# Altium PCB 7P00089A.PcbDoc
Units mm, origin at the board's own origin, x right, y up, seen from the top; angles counter-clockwise.
Board outline 546.9 x 20 mm, 2 copper layers (Top Layer, Bottom Layer), stack 1.57 mm thick; 50 components, 8 nets, 108 pads, 0 vias.
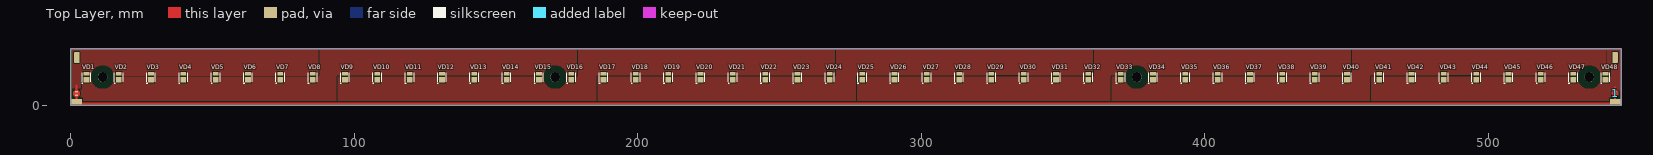
[diagram p0: Top Layer view]
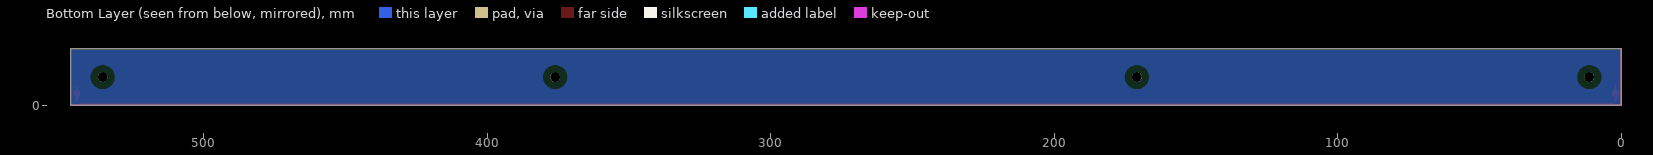
[diagram p1: Bottom Layer view, seen from below]
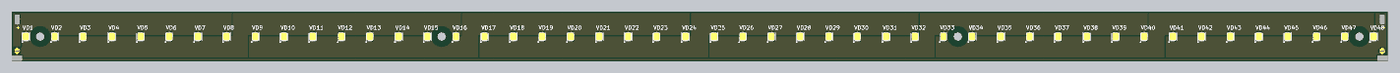
[diagram p2: 3D render of the assembled board from above, using the file's embedded part models]

## Layer stack, top to bottom
Top Solder: solder mask 0.0127, Solder Resist, Dk 3.8
Top Layer: signal copper 0.035
Dielectric: core 1.5, FR-4, Dk 4.5
Bottom Layer: signal copper 0.035
Bottom Solder: solder mask 0.0127, Solder Resist, Dk 3.8

## Board outline
0,0.025 0.025,0.05 0.025,20 546.9,20 546.9,0
cut-out: 0.25,-0.175
cut-out: 0,0

## Design rules (kind name [scope] priority, off if disabled: settings)
Clearance [All] p1: gap=0.254 ignorepadtopadclearanceinfootprint=FALSE except(0: Arc-Hole Track-Hole SMDPad-Hole THPad-Hole Via-Hole Text-Hole; 0.5: Arc-Fill Arc-Poly Arc-Region Track-Fill Track-Poly Track-Region SMDPad-Fill SMDPad-Poly SMDPad-Region Fill-Fill Fill-Poly Fill-Region Poly-Poly Poly-Region Region-Region; 2.5: Fill-Hole Poly-Hole Region-Hole)
PolygonConnect [All] p1: connectstyle=Relief reliefconductorwidth=0.254 reliefentries=4 polygonreliefangle="90 Angle" airgapwidth=0.254
RoutingVias [All] p1: holewidth=0.711 width=1.27 viastyle="Through Hole" minholewidth=0.711 minwidth=1.27 maxholewidth=0.711 maxwidth=1.27
SMDToPlane [All] p1: distance=0
SolderMaskExpansion [All] p1: expansion=0.102
Width [All] p1: maxlimit=1 minlimit=0.254 preferedwidth=0.254
30 further rules are at their usual default settings.

## Components (designator, comment, footprint, x,y, rotation, side; value= is the part's Value field where it differs from the comment)
1 "" O-jumper_NC 544.75,4.2 r90 top
VD1 "LED SMD, SPMWH1228FD5WAWMSG, White, 2700K,  Samsung" LM281B+ 5.55,10 r90 top value=LM281B+
VD2 "LED SMD, SPMWH1228FD5WAWMSG, White, 2700K,  Samsung" LM281B+ 16.95,10 r90 top value=LM281B+
VD3 "LED SMD, SPMWH1228FD5WAWMSG, White, 2700K,  Samsung" LM281B+ 28.35,10 r90 top value=LM281B+
VD4 "LED SMD, SPMWH1228FD5WAWMSG, White, 2700K,  Samsung" LM281B+ 39.75,10 r90 top value=LM281B+
VD5 "LED SMD, SPMWH1228FD5WAWMSG, White, 2700K,  Samsung" LM281B+ 51.15,10 r90 top value=LM281B+
VD6 "LED SMD, SPMWH1228FD5WAWMSG, White, 2700K,  Samsung" LM281B+ 62.55,10 r90 top value=LM281B+
VD7 "LED SMD, SPMWH1228FD5WAWMSG, White, 2700K,  Samsung" LM281B+ 73.95,10 r90 top value=LM281B+
VD8 "LED SMD, SPMWH1228FD5WAWMSG, White, 2700K,  Samsung" LM281B+ 85.35,10 r90 top value=LM281B+
VD9 "LED SMD, SPMWH1228FD5WAWMSG, White, 2700K,  Samsung" LM281B+ 96.75,10 r90 top value=LM281B+
VD10 "LED SMD, SPMWH1228FD5WAWMSG, White, 2700K,  Samsung" LM281B+ 108.15,10 r90 top value=LM281B+
VD11 "LED SMD, SPMWH1228FD5WAWMSG, White, 2700K,  Samsung" LM281B+ 119.55,10 r90 top value=LM281B+
VD12 "LED SMD, SPMWH1228FD5WAWMSG, White, 2700K,  Samsung" LM281B+ 130.95,10 r90 top value=LM281B+
VD13 "LED SMD, SPMWH1228FD5WAWMSG, White, 2700K,  Samsung" LM281B+ 142.35,10 r90 top value=LM281B+
VD14 "LED SMD, SPMWH1228FD5WAWMSG, White, 2700K,  Samsung" LM281B+ 153.75,10 r90 top value=LM281B+
VD15 "LED SMD, SPMWH1228FD5WAWMSG, White, 2700K,  Samsung" LM281B+ 165.15,10 r90 top value=LM281B+
VD16 "LED SMD, SPMWH1228FD5WAWMSG, White, 2700K,  Samsung" LM281B+ 176.55,10 r90 top value=LM281B+
VD17 "LED SMD, SPMWH1228FD5WAWMSG, White, 2700K,  Samsung" LM281B+ 187.95,10 r90 top value=LM281B+
VD18 "LED SMD, SPMWH1228FD5WAWMSG, White, 2700K,  Samsung" LM281B+ 199.35,10 r90 top value=LM281B+
VD19 "LED SMD, SPMWH1228FD5WAWMSG, White, 2700K,  Samsung" LM281B+ 210.75,10 r90 top value=LM281B+
VD20 "LED SMD, SPMWH1228FD5WAWMSG, White, 2700K,  Samsung" LM281B+ 222.15,10 r90 top value=LM281B+
VD21 "LED SMD, SPMWH1228FD5WAWMSG, White, 2700K,  Samsung" LM281B+ 233.55,10 r90 top value=LM281B+
VD22 "LED SMD, SPMWH1228FD5WAWMSG, White, 2700K,  Samsung" LM281B+ 244.95,10 r90 top value=LM281B+
VD23 "LED SMD, SPMWH1228FD5WAWMSG, White, 2700K,  Samsung" LM281B+ 256.35,10 r90 top value=LM281B+
VD24 "LED SMD, SPMWH1228FD5WAWMSG, White, 2700K,  Samsung" LM281B+ 267.75,10 r90 top value=LM281B+
VD25 "LED SMD, SPMWH1228FD5WAWMSG, White, 2700K,  Samsung" LM281B+ 279.15,10 r90 top value=LM281B+
VD26 "LED SMD, SPMWH1228FD5WAWMSG, White, 2700K,  Samsung" LM281B+ 290.55,10 r90 top value=LM281B+
VD27 "LED SMD, SPMWH1228FD5WAWMSG, White, 2700K,  Samsung" LM281B+ 301.95,10 r90 top value=LM281B+
VD28 "LED SMD, SPMWH1228FD5WAWMSG, White, 2700K,  Samsung" LM281B+ 313.35,10 r90 top value=LM281B+
VD29 "LED SMD, SPMWH1228FD5WAWMSG, White, 2700K,  Samsung" LM281B+ 324.75,10 r90 top value=LM281B+
VD30 "LED SMD, SPMWH1228FD5WAWMSG, White, 2700K,  Samsung" LM281B+ 336.15,10 r90 top value=LM281B+
VD31 "LED SMD, SPMWH1228FD5WAWMSG, White, 2700K,  Samsung" LM281B+ 347.55,10 r90 top value=LM281B+
VD32 "LED SMD, SPMWH1228FD5WAWMSG, White, 2700K,  Samsung" LM281B+ 358.95,10 r90 top value=LM281B+
VD33 "LED SMD, SPMWH1228FD5WAWMSG, White, 2700K,  Samsung" LM281B+ 370.35,10 r90 top value=LM281B+
VD34 "LED SMD, SPMWH1228FD5WAWMSG, White, 2700K,  Samsung" LM281B+ 381.75,10 r90 top value=LM281B+
VD35 "LED SMD, SPMWH1228FD5WAWMSG, White, 2700K,  Samsung" LM281B+ 393.15,10 r90 top value=LM281B+
VD36 "LED SMD, SPMWH1228FD5WAWMSG, White, 2700K,  Samsung" LM281B+ 404.55,10 r90 top value=LM281B+
VD37 "LED SMD, SPMWH1228FD5WAWMSG, White, 2700K,  Samsung" LM281B+ 415.95,10 r90 top value=LM281B+
VD38 "LED SMD, SPMWH1228FD5WAWMSG, White, 2700K,  Samsung" LM281B+ 427.35,10 r90 top value=LM281B+
VD39 "LED SMD, SPMWH1228FD5WAWMSG, White, 2700K,  Samsung" LM281B+ 438.75,10 r90 top value=LM281B+
VD40 "LED SMD, SPMWH1228FD5WAWMSG, White, 2700K,  Samsung" LM281B+ 450.15,10 r90 top value=LM281B+
VD41 "LED SMD, SPMWH1228FD5WAWMSG, White, 2700K,  Samsung" LM281B+ 461.55,10 r90 top value=LM281B+
VD42 "LED SMD, SPMWH1228FD5WAWMSG, White, 2700K,  Samsung" LM281B+ 472.95,10 r90 top value=LM281B+
VD43 "LED SMD, SPMWH1228FD5WAWMSG, White, 2700K,  Samsung" LM281B+ 484.35,10 r90 top value=LM281B+
VD44 "LED SMD, SPMWH1228FD5WAWMSG, White, 2700K,  Samsung" LM281B+ 495.75,10 r90 top value=LM281B+
VD45 "LED SMD, SPMWH1228FD5WAWMSG, White, 2700K,  Samsung" LM281B+ 507.15,10 r90 top value=LM281B+
VD46 "LED SMD, SPMWH1228FD5WAWMSG, White, 2700K,  Samsung" LM281B+ 518.55,10 r90 top value=LM281B+
VD47 "LED SMD, SPMWH1228FD5WAWMSG, White, 2700K,  Samsung" LM281B+ 529.95,10 r90 top value=LM281B+
VD48 "LED SMD, SPMWH1228FD5WAWMSG, White, 2700K,  Samsung" LM281B+ 541.35,10 r90 top value=LM281B+
? "" O-jumper_NC 2.05,4.2 r90 top

## Footprints (in the part's own frame and the unit in brackets; to place one, negate y for a bottom-side part, rotate by r counter-clockwise, add the part's x,y. Pads: shape width x height; smd on the part's side, far side on the other; paste and mask are expansions set on the pad)
LM281B+ [mm] "bin SG /30.07.2019"
  rect 1.95x2 smd: 1(-0.875,0)
  rect 1.3x2 smd: 2(1.2,0)
  silkscreen extent -2.45,-1.55 1.6,1.75, body extent -1.75,-1.4 1.75,1.4, height 0.64
O-jumper_NC [mm]
  oval 0.5x1 smd paste-2: 1(-0.635,0) 2(0.635,0)
  Top Layer region: -0.127,-1.143 -0.516,-1.066 -0.845,-0.845 -1.066,-0.516 -1.143,-0.127 -1.143,-0.127 -1.143,0.127 -1.066,0.516 -0.845,0.845 -0.516,1.066 -0.127,1.143 -0.127,1.143
  Top Layer region: 0.127,1.143 0.516,1.066 0.845,0.845 1.066,0.516 1.143,0.127 1.143,0.127 1.143,-0.127 1.066,-0.516 0.845,-0.845 0.516,-1.066 0.127,-1.143 0.127,-1.143

## Part data
VD1 VD2 VD3 VD4 VD5 VD6 VD7 VD8 VD9 VD10 VD11 VD12 VD13 VD14 VD15 VD16 VD17 VD18 VD19 VD20 VD21 VD22 VD23 VD24 VD25 VD26 VD27 VD28 VD29 VD30 VD31 VD32 VD33 VD34 VD35 VD36 VD37 VD38 VD39 VD40 VD41 VD42 VD43 VD44 VD45 VD46 VD47 VD48: library part 4278, "LLED SMD, SPMWH1228FD5WAWMSG, White, 2700K,  Samsung", Manufacturer=Samsung, Manufacturer_PN=SPMWH1228FD5WAWMSG, Operating_Temperature=-40...+80°C, Package="1113 (2835 Metric)", Component_Group=Diodes, Component_Type=LED, ComponentLink1Description=Datasheet, Date_of_Creation="30.07.2019 11:32:19", Date_of_Update="30.07.2019 11:32:19", idComponent=4278, Jofre_PN=HL00050, Mounting_Type=SMD, Notes="price KVV", Price_EUR=0,14, Status=Unchecked, User=Busliuk@ke-bav

## Free pads (board coordinates)
  rect 4x2 smd: 3(2,1.302) ""(544.925,1.3)
  rrect50% 2x4 smd: 3(2.177,16.9) ""(544.75,16.9)
  round 3.4 hole 3.4 unplated: 5(11.25,10) 5(170.85,10) 5(376.05,10) 5(535.65,10)

## Nets (pads, with @x,y where several pads share a name; then routed paths per layer and width w, separated by ;. In a path a pad name is that pad's centre, name@x,y a point inside that pad or via, vN(x,y) a via of type N, cw(c..) or ccw(c..) an arc to the next point about the centre after c; other vN are vias at no path point)
NetVD1_1: VD1.1 VD2.1 VD3.1 VD4.1 VD5.1 VD6.1 VD7.1 VD8.1 VD9.2 VD10.2 VD11.2 VD12.2 VD13.2 VD14.2 VD15.2 VD16.2
NetVD1_2: pad.3@2.177,16.9 VD1.2 VD2.2 VD3.2 VD4.2 VD5.2 VD6.2 VD7.2 VD8.2 | length 2.2
  Top Layer w0.7: 2.05,4.835 2.05,7.008
NetVD9_1: VD9.1 VD10.1 VD11.1 VD12.1 VD13.1 VD14.1 VD15.1 VD16.1 VD17.2 VD18.2 VD19.2 VD20.2 VD21.2 VD22.2 VD23.2 VD24.2
NetVD17_1: VD17.1 VD18.1 VD19.1 VD20.1 VD21.1 VD22.1 VD23.1 VD24.1 VD25.2 VD26.2 VD27.2 VD28.2 VD29.2 VD30.2 VD31.2 VD32.2
NetVD25_1: VD25.1 VD26.1 VD27.1 VD28.1 VD29.1 VD30.1 VD31.1 VD32.1 VD33.2 VD34.2 VD35.2 VD36.2 VD37.2 VD38.2 VD39.2 VD40.2
NetVD33_1: VD33.1 VD34.1 VD35.1 VD36.1 VD37.1 VD38.1 VD39.1 VD40.1 VD41.2 VD42.2 VD43.2 VD44.2 VD45.2 VD46.2 VD47.2 VD48.2
NetVD41_1: pad.@544.75,16.9 VD41.1 VD42.1 VD43.1 VD44.1 VD45.1 VD46.1 VD47.1 VD48.1 | length 1.4
  Top Layer w0.7: 544.75,4.864 544.75,6.309
NetXS2_1: 1.1 pad.3@2,1.302 pad.@544.925,1.3 | length 545.1
  Top Layer w0.7: pad.3@2.05,1.3 2.05,3.565 ; pad.3@2.75,0.7 pad.@543.55,0.7 ; pad.@544.75,1.482 1.1@544.75,3.49
pads on no net: 1.2 ?.1 ?.2
copper on no net: | length 3.2
  Top Layer w0.01: 543.614,4.376 cw(c544.75,4.192) 545.886,4.376

## Polygon pours and split planes (outlines as drawn)
no net on Top Layer "Top Layer-No Net 1" (solid, remove dead copper, pour order 32): 0.354,10.5
NetVD1_1 on Top Layer "Top Layer-No Net 1" (solid, remove dead copper, pour order 30): 3.5,10.1 87.35,10.1 87.35,20 178.95,20 178.95,10.5 167.335,10.5 94.7,10.5 94.7,0 3.5,0
NetVD9_1 on Top Layer "Top Layer-No Net 1" (solid, remove dead copper, pour order 28): 94.25,10.1 178.95,10.1 178.95,20 269.95,20 269.95,10.5 258.935,10.5 185.9,10.5 185.9,0 94.25,0
NetVD17_1 on Top Layer "Top Layer-No Net 1" (solid, remove dead copper, pour order 26): 185.9,10.1 269.95,10.1 269.95,20 360.95,20 360.95,10.5 349.935,10.5 277.35,10.5 277.35,0 185.9,0
NetVD25_1 on Top Layer "Top Layer-No Net 1" (solid, remove dead copper, pour order 24): 277.35,10.1 360.95,10.1 360.95,20 451.95,20 451.95,10.5 440.935,10.5 368.2,10.5 368.2,0 277.35,0
NetVD33_1 on Top Layer "Top Layer-No Net 1" (solid, remove dead copper, pour order 22): 367.25,10.1 451.95,10.1 451.95,20 542.55,20 542.55,13.3 543.85,13.3 543.85,10.5 531.935,10.5 459.45,10.5 459.45,0 367.25,0
NetVD41_1 on Top Layer "Top Layer-No Net 1" (solid, remove dead copper, pour order 20): 458.65,10.1 543.35,10.1 543.35,13.7 542.05,13.7 542.05,20 543.35,20 546.9,20 546.9,0 458.65,0
NetVD1_2 on Top Layer "Top Layer-No Net 1" (solid, remove dead copper, pour order 18): -0.006,20.033 -0.002,6.052 3.5,6.052 3.5,10.533 87.298,10.533 87.298,19.992
no net on Bottom Layer "NONET_L02_P034" (solid, pour order 34): 0,20 0,0 546.9,0 546.9,20

## Keep-outs
Keep-Out Layer:
  lines w0.013: 0,0 546.9,0 ; 0,0 546.9,0 ; 0,0 546.9,0 ; 0,0 0,20 ; 0,0 0,20 ; 0,0 0,20 ; 0,20 546.9,20 ; 0,20 546.9,20 ; 0,20 546.9,20 ; 546.9,0 546.9,20 ; 546.9,0 546.9,20 ; 546.9,0 546.9,20

## Silkscreen, mask and mechanical layers (free items; w line width, h text height)
Top Solder:
  text "7P00089A 1942 MPLB-01" at 509.8,17.15 h1.52
  text "+" at 1.38,12.7 h1.52
  text "-" at 544.148,12.7 h1.52
Board Outline:
  lines w0.013: 0,0 0,20 546.9,20 546.9,0 0,0
Board Dimensions:
  lines w0.013: 0,0 546.9,0 546.9,20 0,20 0,0
Top Courtyard:
  drawing of 2609 lines, arcs and shapes, not listed

## Dimensions
546.9,20 to 546.9,0 on Board Dimensions
546.9,20 to 0,20 on Board Dimensions